# EAGLE board lv1-recovery-digital-1 (EAGLE 3.55)
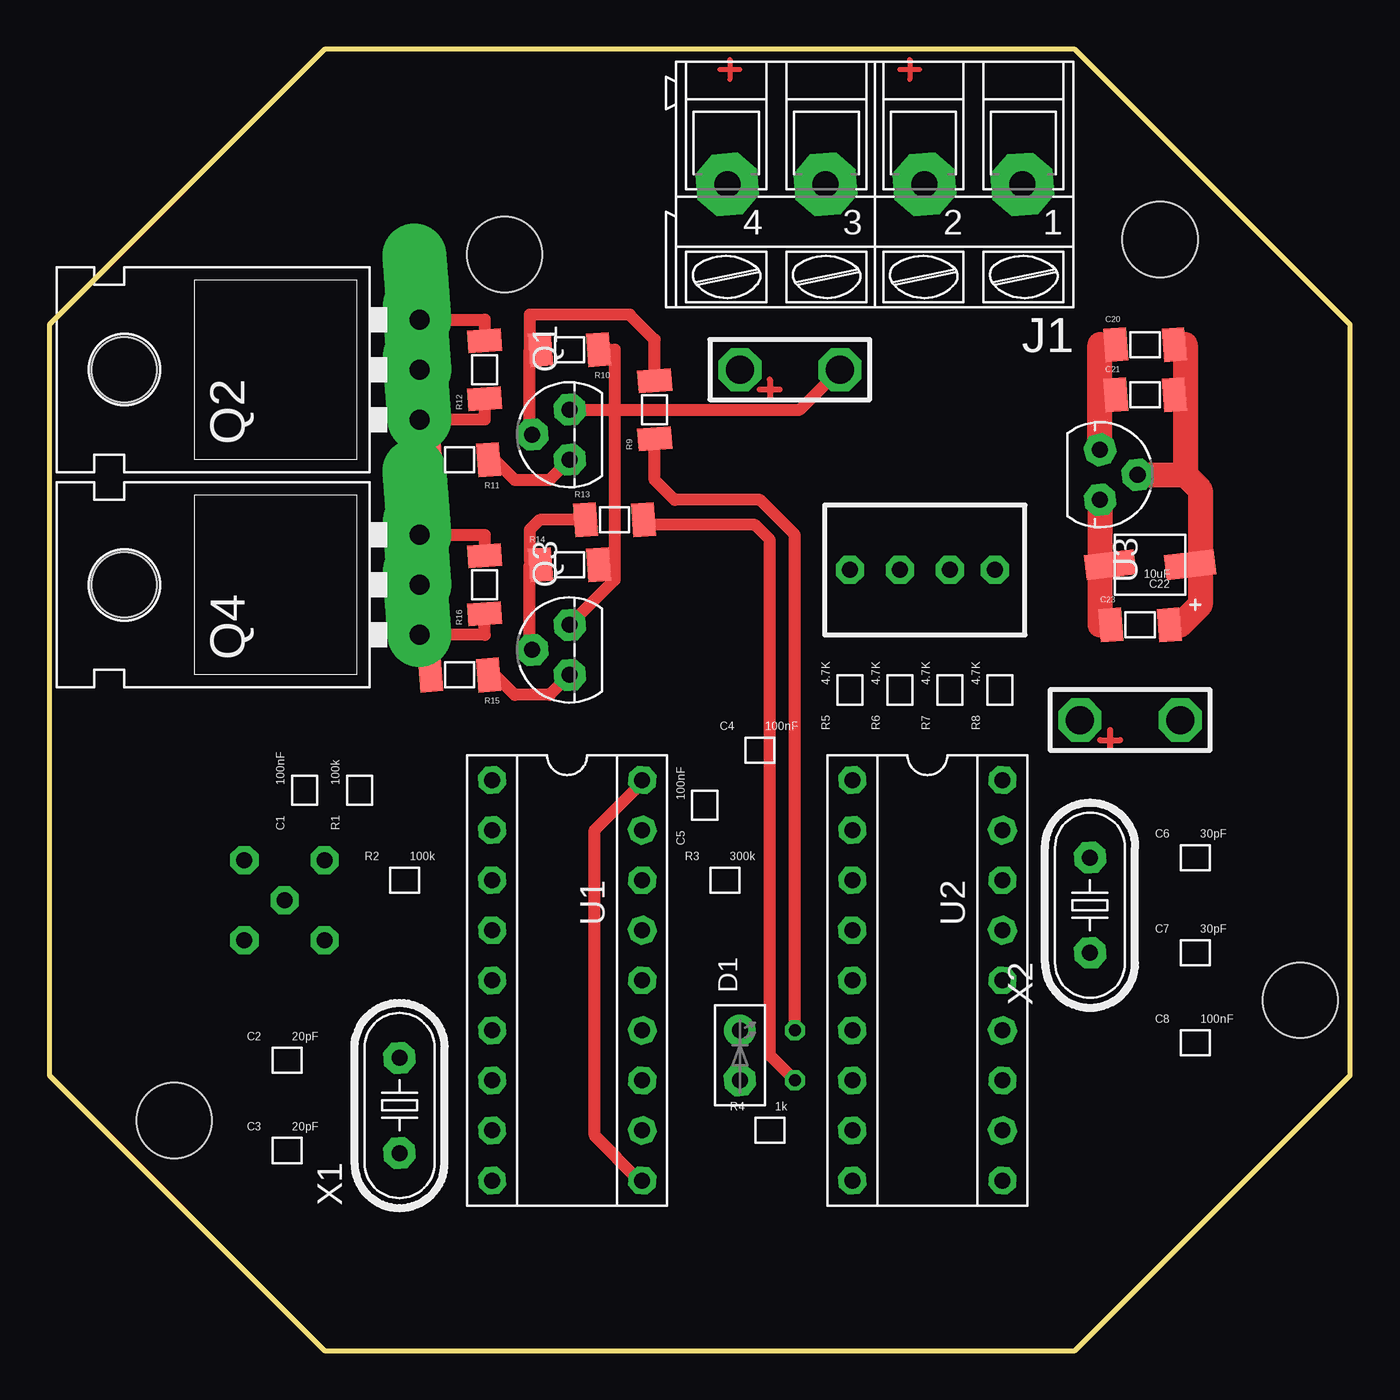
[diagram p0: board, top side]
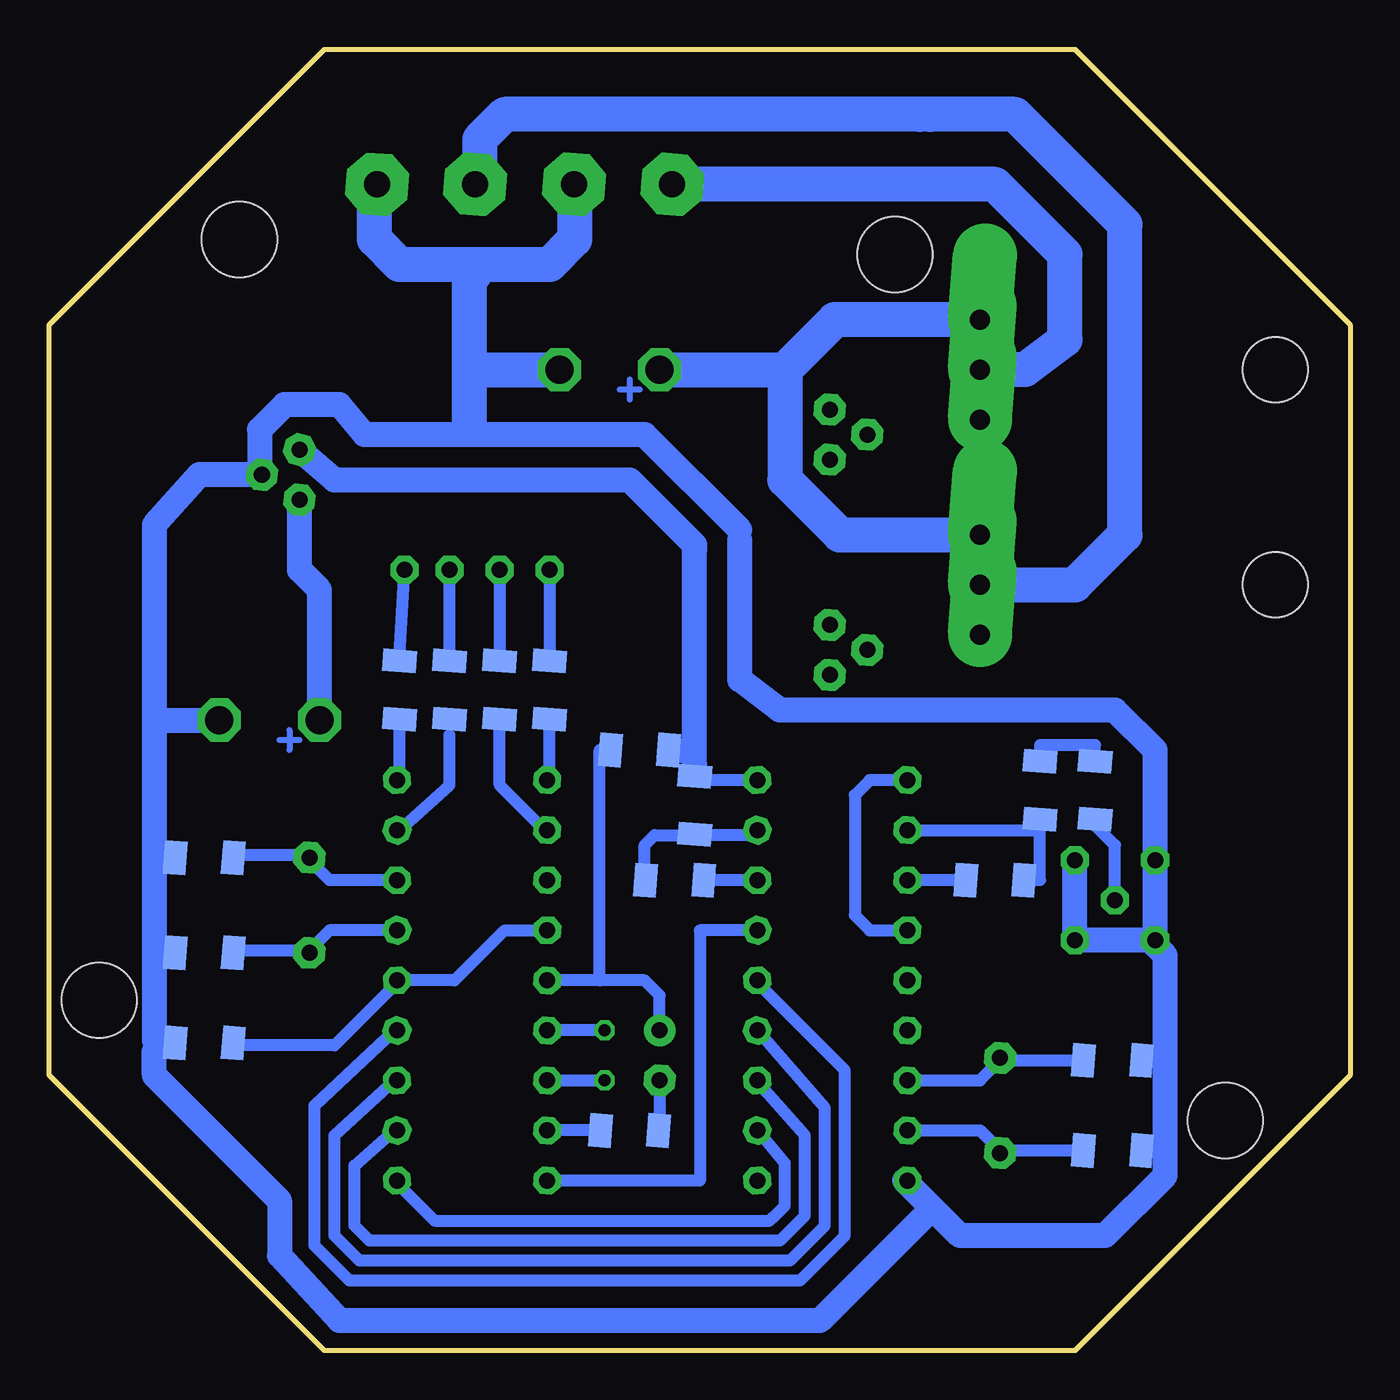
[diagram p1: board, bottom side, seen from below]

Size 66.04 x 66.04 mm. Coordinates in mm from the lower left corner, seen from the top.
Outline: 0,52.07 0,13.97 13.97,0 52.07,0 66.04,13.97 66.04,52.07 52.07,66.04 13.97,66.04 0,52.07
Copper layers used: Top, Bottom
Holes 3.81 mm at 56.39,56.39 23.11,55.63 6.35,11.68 63.5,17.78

## Footprints (pad centres in the part's own frame; a part is rotated, then mirrored left to right if it is on the bottom)
06B = smd 1.143 x 1.702 rotated 4.4 bottom:  1.473,0 | smd 1.143 x 1.702 rotated 4.3 bottom:  -1.473,0
06_V2 = smd 1.143 x 1.702 rotated 4.4:  1.473,0 | smd 1.143 x 1.702 rotated 4.3:  -1.473,0
A_B = smd 1.27 x 2.54 rotated 97:  -2.032,0;  2.032,0
D2X5 = drill 0.813 pad 1.6 octagon:  -1.27,0 | drill 0.813 pad 1.6 round:  1.27,0
300/4 = drill 1.321 pad 3.15 octagon:  -7.493,0;  -2.515,0;  2.515,0;  7.493,0
92 = drill 0.813 pad 1.6 octagon:  1.27,0;  0,1.905;  -1.27,0
220L1 = drill 1.016 pad 3.251 offset:  -2.54,-3.81;  0,-3.81;  2.54,-3.81 | hole 3.302: 0,11.176
06 = smd 1.143 x 1.702 rotated 4.4:  1.473,0 | smd 1.143 x 1.702 rotated 4.3:  -1.473,0
P-18 = drill 0.813 pad 1.397 octagon:  -10.16,-3.81;  -7.62,-3.81;  0,-3.81;  2.54,-3.81;  -5.08,-3.81;  -2.54,-3.81;  5.08,-3.81;  7.62,-3.81;  10.16,-3.81;  10.16,3.81;  7.62,3.81;  5.08,3.81;  2.54,3.81;  0,3.81;  -2.54,3.81;  -5.08,3.81;  -7.62,3.81;  -10.16,3.81
LXX = drill 0.813 pad 1.6 octagon:  -1.27,0;  0,1.905;  1.27,0
49U-V = drill 0.813 pad 1.6 octagon:  -2.413,0;  2.413,0

## Placement (x,y rotation side)
C1  100nF  [06B]  12.95,28.45 90 top
C2  20pF  [06B]  12.07,14.73 0 top
C3  20pF  [06B]  12.07,10.16 0 top
C4  100nF  [06B]  36.07,30.48 0 top
C5  100nF  [06B]  33.27,27.69 90 top
C6  30pF  [06B]  58.17,25.02 0 top
C7  30pF  [06B]  58.17,20.19 0 top
C8  100nF  [06B]  58.17,15.62 0 top
C20  100nF  [06_V2]  55.63,51.05 0 top
C21  1uF  [06_V2]  55.63,48.51 0 top
C22  10uF  [A_B]  55.88,39.88 180 top
C23  100nF  [06_V2]  55.37,36.83 0 top
D1  [D2X5]  35.05,14.99 90 top
J1  [300/4]  41.91,59.18 180 top
Q1  [92]  26.42,46.48 90 top
Q2  [220L1]  14.99,49.78 90 top
Q3  [92]  26.42,35.56 90 top
Q4  [220L1]  14.99,38.86 90 top
R1  100k  [06B]  15.75,28.45 90 top
R2  100k  [06B]  18.03,23.88 0 top
R3  300k  [06B]  34.29,23.88 0 top
R4  1k  [06B]  36.58,11.18 0 top
R5  4.7K  [06B]  40.64,33.53 90 top
R6  4.7K  [06B]  43.18,33.53 90 top
R7  4.7K  [06B]  45.72,33.53 90 top
R8  4.7K  [06B]  48.26,33.53 90 top
R9  680  [06]  30.73,47.75 90 top
R10  1K  [06]  26.42,50.8 180 top
R11  680  [06]  20.83,45.21 180 top
R12  1K  [06]  22.1,49.78 90 top
R13  680  [06]  28.7,42.16 0 top
R14  1K  [06]  26.42,39.88 0 top
R15  680  [06]  20.83,34.29 180 top
R16  1K  [06]  22.1,38.86 90 top
U1  [P-18]  26.29,18.8 270 top
U2  [P-18]  44.58,18.8 270 top
U3  [LXX]  53.34,44.45 270 top
X1  [49U-V]  17.78,12.45 90 top
X2  [49U-V]  52.83,22.61 90 top

## Library data of the parts
C1-C8 C20-C23 R1-R16 = SMD
D1 = LED
J1 = PTR500
Q1 Q3 = NPN
Q2 Q4 U3 = V-REG
U1 U2 = IC
X1 X2 = QUARTZ

## Nets
S$6: U1.
S$9: U1.
S$15: U3.
S$27: D1.
S$33: D1.
S$38: U1.
S$47: U3.
S$48: Q2. Q4.
S$62: Q1. Q3.
S$68: Q1.
S$71: Q3.

## Tracks (layer width: path | path; a pad name or v marks a point on that pad's centre or on a via)
R8
  Bottom 0.61: 48.26,28.96 48.26,31.5
R10
  Top 0.61: 20.07,47.24 22.1,47.24 22.1,47.75
S$1
  Bottom 0.61: 30.23,21.34 33.02,21.34 33.02,8.64 40.89,8.64
S$2
  Bottom 0.61: 22.35,28.96 24.38,28.96 25.15,28.19 25.15,22.1 24.38,21.34 22.61,21.34
S$3
  Bottom 0.61: 19.81,23.88 22.35,23.88
S$4
  Bottom 0.61: 16.26,23.88 15.75,23.88 15.75,26.42 22.35,26.42
S$5
  Bottom 0.61: 12.95,30.23 12.95,30.73 15.75,30.73 15.75,30.23
S$6
  Bottom 0.61: 30.1,11.18 28.7,9.53 28.7,7.37 29.34,6.73
S$7
  Bottom 0.61: 48.51,23.88 51.82,23.88 52.83,24.89
S$8
  Bottom 0.61: 48.51,21.34 51.82,21.34 52.83,20.32
S$9
  Bottom 0.61: 26.67,12.32 30.1,16.26
S$10
  Top 0.61: 29.97,8.64 27.69,10.92 27.69,26.42 29.97,28.7
S$11  (via drill 0.81 pad 1.42)
  Bottom 0.61: 12.95,26.67 11.94,25.65 v11.94,22.86
S$12  (via drill 1.42 pad 2.18)
  Bottom 1.27: 59.94,15.75 60.71,15.75 60.71,32 | 60.71,32 v57.4,32 | 60.71,32 60.71,41.91 58.42,44.45 55.37,44.45 | 55.37,44.45 55.12,44.45 | 55.37,44.45 55.37,46.74 54.1,48.01 51.31,48.01 50.04,46.48 35.81,46.48 30.99,41.66
S$13
  Top 0.61: 19.3,45.21 19.3,46.48
S$14  (via drill 1.42 pad 2.18)
  Bottom 1.27: v52.32,32 52.32,38.35
S$15
  Top 1.27: U3. 53.34,36.83
  Bottom 1.27: 52.32,38.61 53.34,39.62 U3.
S$16
  Bottom 0.61: 22.35,13.72 18.8,13.72 17.78,14.73 14.22,14.73
S$17
  Bottom 0.61: 22.61,11.18 18.8,11.18 17.78,10.16
S$18
  Bottom 0.61: 13.72,10.16 17.53,10.16 17.78,9.91
S$19
  Bottom 1.27: 22.61,8.64 19.81,5.84 12.45,5.84 9.4,8.89 9.4,17.27
S$20  (via drill 0.81 pad 1.42)
  Bottom 0.61: v40.64,39.62 40.64,35.31
S$21  (via drill 0.81 pad 1.42)
  Bottom 0.61: v43.18,39.62 43.18,35.31
S$22
  Bottom 0.61: 30.23,23.88 32.51,23.88
S$23
  Bottom 0.61: 30.23,26.16 32.77,26.16
S$24
  Bottom 0.61: 30.23,28.96 32.77,28.96
S$25
  Top 0.61: 19.3,34.29 19.3,35.56
S$26
  Bottom 0.61: 35.81,24.38 35.81,25.65 35.31,26.16 33.78,26.16
S$27
  Bottom 0.61: 37.59,30.48 38.1,30.48 38.1,18.8 | D1. 35.05,18.03 35.81,18.8 38.1,18.8 | 38.1,18.8 40.89,18.8
S$28
  Bottom 0.61: 40.89,21.34 42.93,21.34 45.47,18.8 48.26,18.8
S$29
  Bottom 0.61: 38.35,11.18 40.64,11.18
S$30
  Bottom 0.61: 48.51,18.54 51.56,15.49 56.64,15.49
S$31
  Bottom 0.61: 40.64,28.96 40.64,31.5
S$32
  Bottom 0.61: 43.18,31.5 43.18,28.7 40.89,26.42
S$33
  Bottom 0.61: 35.05,13.72 35.05,11.94
S$34  (via drill 0.81 pad 1.42)
  Bottom 0.61: 45.72,35.31 v45.72,39.62
S$35  (via drill 0.61 pad 0.81)
  Top 0.61: v37.85,16.26 37.85,41.4 36.07,43.18 31.75,43.18 30.73,44.2 30.73,45.97
  Bottom 0.61: v37.85,16.26 40.64,16.26
S$36
  Top 1.27: 57.66,51.05 57.66,44.45 | 57.66,44.45 58.42,43.69 58.42,37.85 57.4,36.83 | 55.12,44.45 57.66,44.45
S$37  (via drill 0.61 pad 0.81)
  Top 0.61: v37.85,13.72 36.58,14.99 36.58,41.15 35.81,41.91 30.48,41.91
  Bottom 0.61: 40.64,13.72 v37.85,13.72
S$38
  Bottom 0.61: 48.51,11.18 50.55,9.4 50.55,6.35 49.78,5.59 28.96,5.59 27.69,6.86 27.69,10.92 29.72,13.21 30.1,13.72
S$39
  Bottom 0.61: 48.51,13.72 51.56,10.92 51.56,5.84 50.29,4.57 28.45,4.57 26.67,6.35 26.67,12.19
S$40
  Bottom 1.778: 39.37,59.18 39.37,56.39 40.64,55.12 48.26,55.12 49.53,56.39 49.53,59.18
S$41
  Bottom 0.61: 48.51,16.26 52.58,12.45 52.58,5.33 50.8,3.56 27.94,3.56 25.65,5.84 25.65,14.22 29.97,18.54
S$42
  Bottom 0.61: 48.26,8.38 46.48,6.6 29.46,6.6
S$43
  Bottom 0.61: 56.39,20.32 53.09,20.32
S$44
  Bottom 0.61: 52.83,25.15 56.39,25.15
S$45
  Bottom 0.61: 48.26,26.42 45.72,28.7 45.72,31.24
S$46  (via drill 0.81 pad 1.42)
  Bottom 0.61: 48.26,35.31 v48.01,39.62
S$47
  Top 0.813: 53.34,51.05 53.85,51.05
  Top 1.27: 53.34,45.72 53.34,51.05
  Bottom 1.27: 53.34,45.72 51.56,44.2 36.58,44.2 33.27,40.89
S$48  (via drill 1.42 pad 2.18)
  Bottom 1.778: Q2. 26.16,52.32 28.7,49.78 | v35.05,49.78 28.7,49.78 | 28.7,49.78 28.7,44.2 25.91,41.4 Q4.
S$49
  Bottom 1.27: 21.59,6.86 26.92,1.52
S$50
  Bottom 1.27: 27.18,1.52 51.31,1.52 54.36,4.83 54.36,7.62 60.71,13.97 60.71,15.24
S$51
  Bottom 1.27: 33.27,29.72 33.27,40.64
S$52
  Bottom 1.27: 34.29,30.48 33.53,30.48
S$53
  Bottom 1.778: 18.54,38.86 13.97,38.86 11.43,41.4 11.43,57.15 17.02,62.74 21.84,62.74 | 44.2,59.44 44.2,61.47 42.93,62.74 21.84,62.74 | 21.34,62.74 21.84,62.74
S$54
  Bottom 0.305: 53.34,30.99 54.36,30.99
S$55
  Bottom 0.305: 53.85,31.5 53.85,30.48
S$56
  Bottom 0.305: 36.07,48.77 37.08,48.77
S$57
  Bottom 0.305: 36.58,49.28 36.58,48.26
S$58
  Top 0.305: 36.58,49.28 36.58,48.26
S$59
  Top 0.305: 37.08,48.77 36.07,48.77
S$60
  Top 0.305: 53.34,30.99 54.36,30.99
S$61
  Top 0.305: 53.85,31.5 53.85,30.48
S$62  (via drill 1.42 pad 2.18)
  Top 0.61: 26.42,47.75 28.7,47.75 | 28.7,47.75 38.1,47.75 v40.13,49.78 | 28.45,50.8 28.7,50.8 28.7,47.75 | 28.7,47.75 28.7,39.88 | 28.7,39.88 28.45,39.88 | 28.7,39.88 28.7,39.12 26.42,36.83
  Bottom 1.778: 44.7,49.78 v40.13,49.78 | 44.7,49.78 44.7,54.36 44.45,54.61 | 44.7,46.74 44.7,49.78
S$63
  Top 0.61: 20.07,52.32 22.1,52.32 22.1,51.82
S$64  (via drill 0.81 pad 1.42)
  Bottom 1.27: v9.91,24.89 9.91,30.48 11.94,32.51 28.96,32.51 30.99,34.04 30.99,41.15 | v13.97,24.89 v13.97,20.83 v9.91,20.83 | v9.91,20.83 v9.91,24.89 | v9.91,20.83 v9.91,24.89 | v9.91,20.83 9.91,20.57 9.4,20.07 9.4,17.53
S$65
  Bottom 1.778: 19.05,49.78 16.51,49.78 14.48,51.31 14.48,55.63 18.03,59.18 34.04,59.18 34.29,58.93
S$66
  Top 0.61: 20.07,41.4 22.1,41.4 22.1,40.89
S$67
  Top 0.61: 20.07,36.32 22.1,36.32 22.1,37.08
S$68
  Top 0.61: Q1. 25.4,44.2 23.62,44.2 22.61,45.21
S$69
  Top 0.61: 24.38,46.48 24.38,50.8 | 24.38,50.8 24.64,50.8 | 30.73,49.53 30.73,51.31 29.46,52.58 24.38,52.58 24.38,50.8
S$70
  Top 0.61: 24.64,39.88 24.38,39.88 24.38,35.56
S$71
  Top 0.61: Q3. 25.4,33.27 23.62,33.27 22.61,34.29
S$72
  Top 0.254: 34.54,65.53 34.54,64.52
S$73
  Top 0.61: 26.92,42.16 24.89,42.16 24.38,41.66 24.38,40.13
S$74
  Top 0.254: 34.04,65.02 35.05,65.02
S$75
  Top 0.254: 43.18,65.02 44.2,65.02
S$76
  Top 0.254: 43.69,65.53 43.69,64.52